# Altium PCB 795540071NUCLEO-DG_V3.PcbDoc (part 1 of 2)
Units mm, origin at the board's own origin, x right, y up, seen from the top; angles counter-clockwise.
Board outline 74.51 x 73.97 mm, 2 copper layers (Top Layer, Bottom Layer); 62 components, 85 nets, 350 pads, 246 vias.
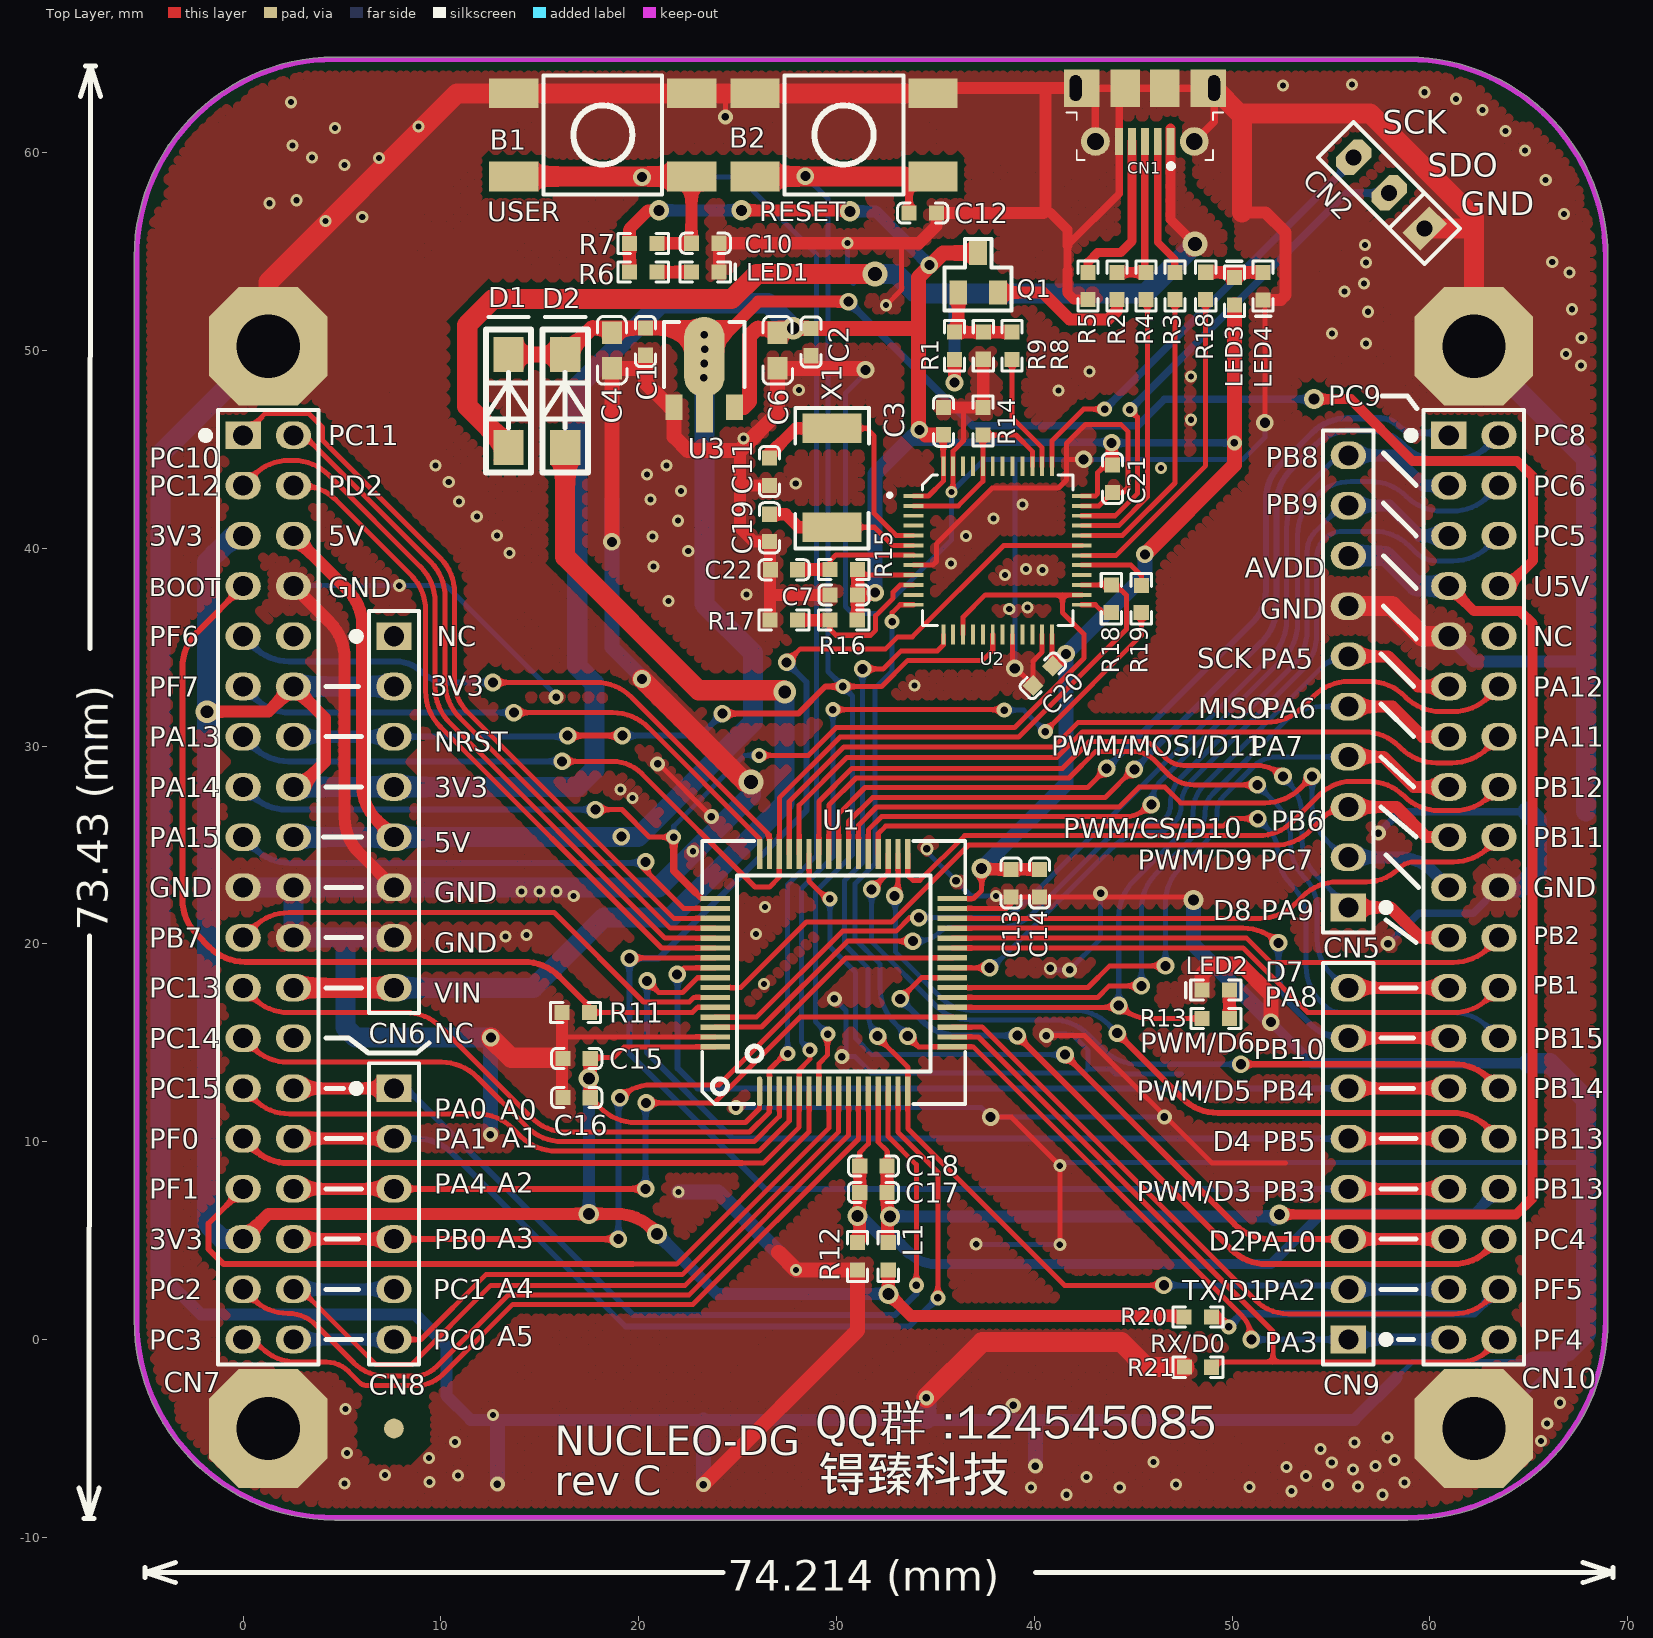
[diagram p0: Top Layer view]
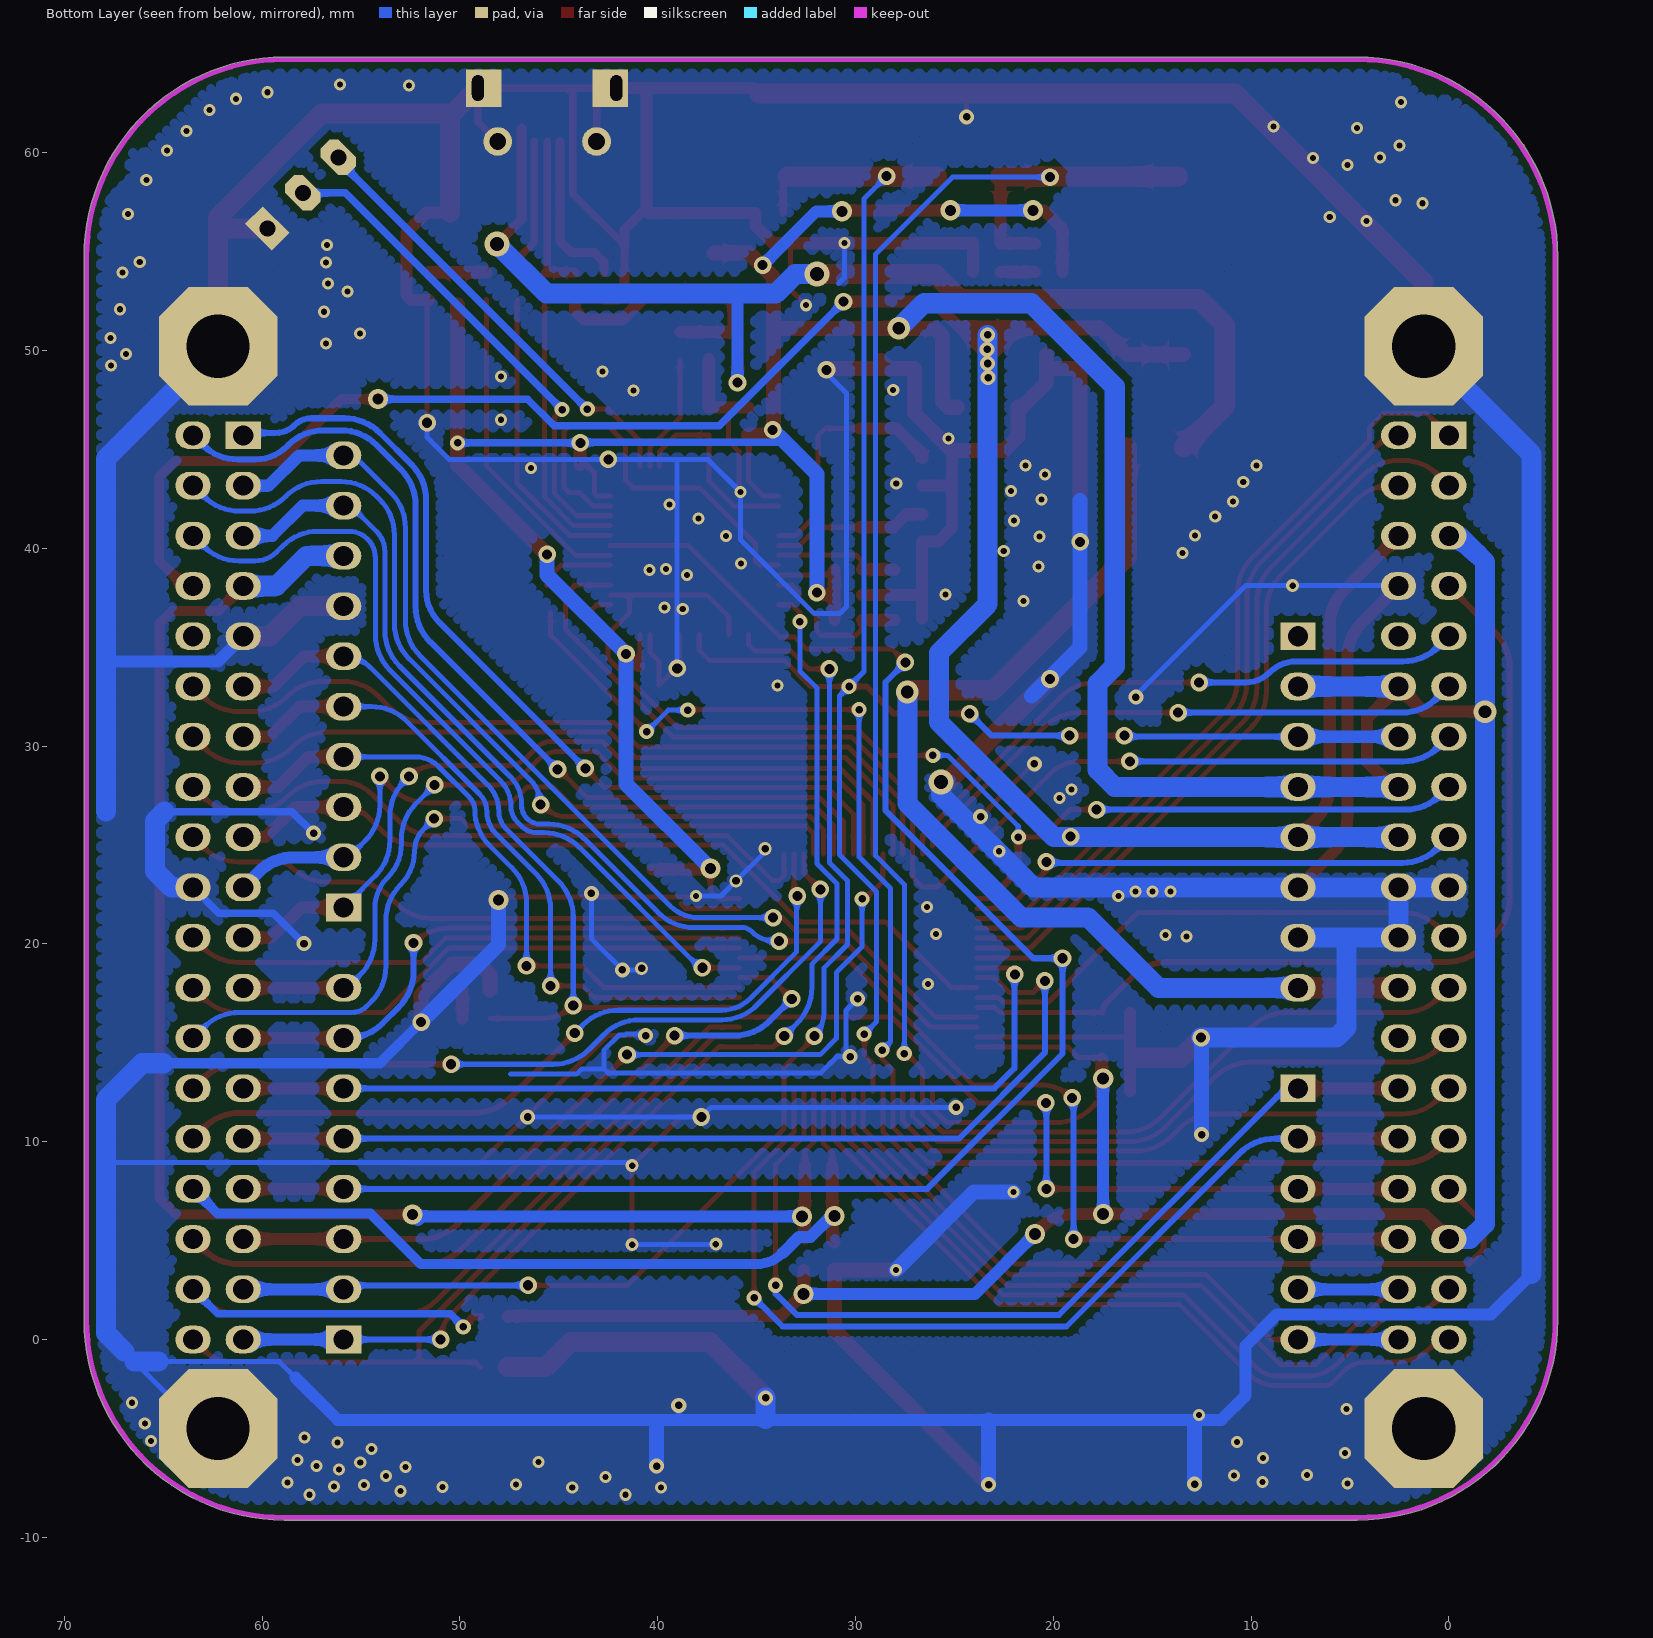
[diagram p1: Bottom Layer view, seen from below]

## Layer stack, top to bottom
Top Solder: solder mask 0.0102, Solder Resist, Dk 3.5
Top Layer: signal copper 0.0356
Dielectric 1: dielectric 0.32, FR-4, Dk 4.8
Bottom Layer: signal copper 0.0356
Bottom Solder: solder mask 0.0102, Solder Resist, Dk 3.5

## Board outline
-5.507,1.008 cw(c-5.38,1.016) -5.507,1.016 -5.507,54.736 cw(c-5.38,54.736) -5.507,54.738 cw(c4.62,54.72) 4.62,64.847 58.88,64.847 cw(c58.88,54.72) 69.007,54.72 cw(c68.88,54.72) 69.007,54.719 69.007,1 cw(c58.88,1) 58.88,-9.127 4.62,-9.127 cw(c4.62,1) -5.507,1 cw(c-5.38,1)

## Design rules (kind name [scope] priority, off if disabled: settings)
Clearance [All] p1: gap=0.33
PolygonConnect [All] p1: connectstyle=Direct reliefconductorwidth=0.254 reliefentries=4 polygonreliefangle="90 Angle" airgapwidth=0.254
RoutingVias [All] p1: holewidth=0.711 width=1.27 viastyle="Through Hole" minholewidth=0.305 minwidth=0.508 maxholewidth=0.711 maxwidth=1.27
SolderMaskExpansion [All] p1: expansion=0.102
Width [All] p1: maxlimit=2.54 minlimit=0.254 preferedwidth=0.254
30 further rules are at their usual default settings.

## Classes and differential pairs
component class NUCLEO-DG: B1 B2 C10 C12 C13 C14 C15 C16 C17 C18 CN5 CN6 CN7 CN8 CN9 CN10 L1 LED1 LED2 R6 R7 R11 R12 R13 R20 R21 U1
component class ST_LINK_V2-1: C1 C2 C3 C4 C6 C7 C11 C19 C20 C21 C22 CN1 CN2 D1 D2 LED3 LED4 Q1 R1 R2 R3 R4 R5 R8 R9 R14 R15 R16 R17 R18 R19 U2 U3 X1

## Components (designator, comment, footprint, x,y, rotation, side; value= is the part's Value field where it differs from the comment)
B1 "USER" KG6*6TP 18.186,60.909 r0 top locked
B2 "RESET" KG6*6TP 30.378,60.909 r0 top locked
C1 "104/10V" 0603C 20.269,50.495 r270 top
C2 "104/10V" 0603C 28.651,50.47 r270 top
C3 "104/10V" 0603C 35.484,46.406 r90 top
C4 "476/16V" 0805C 18.694,50.07 r270 top
C6 "476/16V" 0805C 27.076,50.07 r270 top
C7 "104/10V" 0603C 30.404,37.719 r180 top
C10 "100nF" 0603C 23.393,55.499 r180 top
C11 "20pF/10V" 0603C 26.543,43.917 r270 top
C12 "100nF" 0603C 34.392,57.023 r180 top
C13 "105" 0603C 38.76,23.114 r270 top
C14 "100nF" 0603C 40.208,23.114 r270 top
C15 "100nF" 0603C 16.891,14.275 r180 top
C16 "100nF" 0603C 16.891,12.294 r180 top
C17 "1uF" 0603C 31.902,7.493 r180 top
C18 "100nF" 0603C 31.902,8.839 r180 top
C19 "20pF/10V" 0603C 26.543,41.072 r270 top
C20 "104/10V" 0603C 40.411,33.63 r225 top
C21 "104/10V" 0603C 43.891,43.561 r270 top
C22 "104/10V" 0603C 27.381,38.989 r180 top
CN1 "1050170001" Molex_1050170001 45.593,60.579 r180 top
CN2 "CON3" SIP3 59.741,56.185 r135 top
CN5 "Header 10X1_Female" 1*10P_FEMALE 55.88,21.844 r90 top locked
CN6 "Header 8X1_Female" 1*8P_FEMALE 7.62,35.56 r270 top locked (schematic designator CN8)
CN7 "Header 19X2" 2*19P 0,45.72 r270 top locked (schematic designator CN9)
CN8 "Header 6X1_Female" 1*6P_FEMALE 7.62,12.7 r270 top locked (schematic designator CN14)
CN9 "Header 8X1_Female" 1*8P_FEMALE 55.88,0 r90 top locked (schematic designator CN11)
CN10 "Header 19X2" 2*19P 60.96,45.72 r270 top locked
D1 "SS14" TP4007 13.411,45.108 r90 top
D2 "SS14" TP4007 16.281,45.108 r90 top (schematic designator D3)
L1 "10uH" 0603 32.69,4.267 r90 top
LED1 "RED" 0603D 22.631,53.924 r0 top
LED2 "GREEN" 0603D 49.911,17.729 r180 top
LED3 "GREEN" 0603D 50.177,52.273 r90 top
LED4 "RED" 0603D 51.511,53.996 r270 top
Q1 "9013" SOT23-NPN 37.135,54.94 r0 top
R1 "10K" 0603 35.89,50.19 r270 top
R2 "1K5" 0603 44.111,53.213 r270 top
R3 "22" 0603 47.041,53.213 r270 top
R4 "22" 0603 45.576,53.213 r270 top
R5 "100K" 0603 42.647,53.213 r270 top
R6 "510" 0603 20.168,54.051 r180 top
R7 "10K" 0603 20.168,55.499 r180 top
R8 "100" 0603 38.811,50.19 r270 top
R9 "36K" 0603 37.495,50.316 r90 top
R11 "10K" 0603 16.866,16.459 r0 top
R12 "0" 0603 31.14,4.267 r90 top
R13 "510" 0603 49.124,16.307 r180 top
R14 "10K" 0603 37.338,46.38 r270 top
R15 "100K" 0603 30.429,38.862 r0 top
R16 "10K" 0603 30.302,36.449 r180 top
R17 "10K" 0603 27.28,36.449 r180 top
R18 "100" 0603 43.967,37.516 r90 top
R18 "100" 0603 48.743,53.331 r90 top
R19 "100" 0603 45.339,37.389 r270 top
R20 "0" 0603 48.21,1.219 r180 top
R21 "0" 0603 48.336,-1.473 r0 top
U1 "MCU_LQFP64" LQFP-64 26.111,12.548 r90 top
U2 "STM32F103CBT6" "QFP48 7X7" 38.151,39.903 r270 top (schematic designator U1)
U3 "RS3236-3.3YE3L" SOT-89 21.793,47.139 r0 top
X1 "8MHz(12pF)" XTAL-5032 29.769,41.072 r90 top

## Footprints (in the part's own frame and the unit in brackets; to place one, negate y for a bottom-side part, rotate by r counter-clockwise, add the part's x,y. Pads: shape width x height; smd on the part's side, far side on the other; paste and mask are expansions set on the pad)
1*6P_FEMALE [mil]
  rect 55x70 hole 40: 1(0,0)
  oval 55x70 hole 40: 2(100,0) 3(200,0) 4(300,0) 5(400,0) 6(500,0)
  silkscreen extent -50,-82 550,50
1*8P_FEMALE [mil]
  rect 55x70 hole 40: 1(0,0)
  oval 55x70 hole 40: 2(100,0) 3(200,0) 4(300,0) 5(400,0) 6(500,0) 7(600,0) 8(700,0)
  silkscreen extent -50,-82 750,50
1*10P_FEMALE [mil]
  rect 55x70 hole 40: 1(0,0)
  oval 55x70 hole 40: 2(100,0) 3(200,0) 4(300,0) 5(400,0) 6(500,0) 7(600,0) 8(700,0) 9(800,0) 10(900,0)
  silkscreen extent -50,-82 950,50
2*19P [mil]
  rect 55x70 hole 40: 1(0,0)
  oval 55x70 hole 40: 2(0,100) 3(100,0) 4(100,100) 5(200,0) 6(200,100) 7(300,0) 8(300,100) 9(400,0) 10(400,100) 11(500,0) 12(500,100) 13(600,0) 14(600,100) 15(700,0) 16(700,100) 17(800,0) 18(800,100) 19(900,0) 20(900,100) 21(1000,0) 22(1000,100) 23(1100,0) 24(1100,100) 25(1200,0) 26(1200,100) 27(1300,0) 28(1300,100) 29(1400,0) 30(1400,100) 31(1500,0) 32(1500,100) 33(1600,0) 34(1600,100) 35(1700,0) 36(1700,100) 37(1800,0) 38(1800,100)
  silkscreen extent -50,-82 1850,150
0603 [mil]
  rect 30x30 smd: 1(-29.48,2.91) 2(25.02,2.85)
  silkscreen extent -52,-17 48,23
0603C [mil]
  rect 30x30 smd: 1(-25.86,2.64) 2(28.64,2.57)
  silkscreen extent -49,-17 51,23
0603D [mil]
  rect 30x30 smd: A(1.66,2.32) K(56.16,2.26)
  silkscreen extent -21,-18 89,22
0805C [mil]
  rect 45x40 smd: 1(-33.05,-1.99) 2(37.82,-1.99)
  silkscreen extent -66,-31 69,28
KG6*6TP [mm]
  rect 2.5x1.5 smd: 1(-4.5,2.1) 1(4.5,2.1) 2(-4.5,-2.1) 2(4.5,-2.1)
  silkscreen extent -3,-3 3,3
LQFP-64 [mm]
  oval 1.5x0.27 smd: 1(0,0)
  rect 1.5x0.27 smd: 2(0,-0.5) 3(0,-1) 4(0,-1.5) 5(0,-2) 6(0,-2.5) 7(0,-3) 8(0,-3.5) 9(0,-4) 10(0,-4.5) 11(0,-5) 12(0,-5.5) 13(0,-6) 14(0,-6.5) 15(0,-7) 16(0,-7.5) 33(12,-7.5) 34(12,-7) 35(12,-6.5) 36(12,-6) 37(12,-5.5) 38(12,-5) 39(12,-4.5) 40(12,-4) 41(12,-3.5) 42(12,-3) 43(12,-2.5) 44(12,-2) 45(12,-1.5) 46(12,-1) 47(12,-0.5) 48(12,0)
  rect 0.27x1.5 smd: 17(2.25,-9.75) 18(2.75,-9.75) 19(3.25,-9.75) 20(3.75,-9.75) 21(4.25,-9.75) 22(4.75,-9.75) 23(5.25,-9.75) 24(5.75,-9.75) 25(6.25,-9.75) 26(6.75,-9.75) 27(7.25,-9.75) 28(7.75,-9.75) 29(8.25,-9.75) 30(8.75,-9.75) 31(9.25,-9.75) 32(9.75,-9.75) 49(9.75,2.25) 50(9.25,2.25) 51(8.75,2.25) 52(8.25,2.25) 53(7.75,2.25) 54(7.25,2.25) 55(6.75,2.25) 56(6.25,2.25) 57(5.75,2.25) 58(5.25,2.25) 59(4.75,2.25) 60(4.25,2.25) 61(3.75,2.25) 62(3.25,2.25) 63(2.75,2.25) 64(2.25,2.25)
  silkscreen extent -0.65,-10.4 12.65,2.9
Molex_1050170001 [mm] "USB Micro-B Connector"
  rect 0.4x1.35 smd: 1(-1.3,0) 2(-0.65,0) 3(0,0) 4(0.65,0) 5(1.3,0)
  round 1.45 hole 0.85: 6(-2.5,0) 11(2.5,0)
  rect 1.8x1.9 hole 0.6 slot 1.3 at 90 deg copper offset 0.3,0: 7(-3.5,-2.7)
  rect 1.5x1.9 smd: 8(-1,-2.7) 9(1,-2.7)
  rect 1.8x1.9 hole 0.6 slot 1.3 at 90 deg copper offset -0.3,0: 10(3.5,-2.7)
  silkscreen extent -3.95,-1.46 3.95,1.37, body extent -4.1,-5.21 4.1,0.19, height 2.58
"QFP48 7X7" [mm]
  rect 0.2x1 smd: 1(-2.75,-4.25) 2(-2.25,-4.25) 3(-1.75,-4.25) 4(-1.25,-4.25) 5(-0.75,-4.25) 6(-0.25,-4.25) 7(0.25,-4.25) 8(0.75,-4.25) 9(1.25,-4.25) 10(1.75,-4.25) 11(2.25,-4.25) 12(2.75,-4.25) 25(2.75,4.25) 26(2.25,4.25) 27(1.75,4.25) 28(1.25,4.25) 29(0.75,4.25) 30(0.25,4.25) 31(-0.25,4.25) 32(-0.75,4.25) 33(-1.25,4.25) 34(-1.75,4.25) 35(-2.25,4.25) 36(-2.75,4.25)
  rect 1x0.2 smd: 13(4.25,-2.75) 14(4.25,-2.25) 15(4.25,-1.75) 16(4.25,-1.25) 17(4.25,-0.75) 18(4.25,-0.25) 19(4.25,0.25) 20(4.25,0.75) 21(4.25,1.25) 22(4.25,1.75) 23(4.25,2.25) 24(4.25,2.75) 37(-4.25,2.75) 38(-4.25,2.25) 39(-4.25,1.75) 40(-4.25,1.25) 41(-4.25,0.75) 42(-4.25,0.25) 43(-4.25,-0.25) 44(-4.25,-0.75) 45(-4.25,-1.25) 46(-4.25,-1.75) 47(-4.25,-2.25) 48(-4.25,-2.75)
  silkscreen extent -3.81,-5.52 3.81,3.81
SIP3 [mil]
  rect 50x75 hole 32: 1(0,0)
  oct 50x75 hole 32: 2(100,0) 3(200,0)
  silkscreen extent -50,-50 250,50
SOT23-NPN [mm]
  rect 0.9x1.2 smd: B(-0.975,-2) C(0.015,0) E(1.025,-2)
  silkscreen extent -1.68,-2.9 1.72,0.7
SOT-89 [mil]
  rect 34x50 smd: 1(0,0) 3(120,0)
  rect 34x100 smd: 2(60,0)
  oval 80x160 smd: 2(60,100)
  silkscreen extent -20,40 140,170
TP4007 [mil]
  rect 70x60 smd: A(0,0) K(185,0)
  silkscreen extent -50,-45 260,46
XTAL-5032 [mm]
  rect 1.5x3 smd: 1(0,0) 2(5,0)
  silkscreen extent -1.07,-1.88 6.02,1.85

## Part data
B1 B2: library part SW6, "K"
C1 C2 C3 C4 C6 C7 C19 C20 C21 C22: library part C, "C"
C10 C11 C12: library part CAP, "Capacitor"
C13: library part "CAP SMD 0603  X5R 1礔 25V 10%", "0603  X5R 1礔"
C14 C15 C16 C17 C18: library part Cap, "Capacitor"
CN2: "CN"
CN5: "Header, 10-Pin, Single row,female"
CN6 CN9: "Header, 8-Pin, Single row,female"
CN7 CN10: "Header, 19-Pin, Dual row"
CN8: "Header, 6-Pin, Single row,female"
D1 D2: library part D, "D"
L1: library part Inductor, "Inductor"
LED1 LED2 LED3 LED4: library part LED, "LED"
Q1: library part NPN, "Q"
R1 R9: library part Res1, "Resistor"
R2 R3 R4 R5 R8 R14 R15 R16 R17 R18 R18 R19: library part Resistor_ST, "Resistor 0402 / 0603 / 0805"
R6 R12 R13 R20 R21: library part R, "10K"
R7 R11: library part R
U2: "Medium-density performance line ARM-based 32-bit MCU with 64KB Flash"
U3: library part HT7130, "IC"
X1: library part XTAL, "Crystal Oscillator"

## Free pads (board coordinates)
  oct 6x6 hole 3.2: 1(1.27,50.22) 2(62.23,50.22) 3(62.23,-4.5) 4(1.27,-4.5)
  round 1 smd mask+1: 5(7.62,-4.5)

## Via types
v1: diameter 0.61, hole 0.305, Top Layer to Bottom Layer, 118 vias
v2: diameter 0.889, hole 0.508, Top Layer to Bottom Layer, 62 vias
v3: diameter 0.762, hole 0.381, Top Layer to Bottom Layer, 40 vias
v4: diameter 1.016, hole 0.559, Top Layer to Bottom Layer, 7 vias
v5: diameter 1.016, hole 0.61, Top Layer to Bottom Layer, 6 vias
v6: diameter 0.66, hole 0.33, Top Layer to Bottom Layer, 4 vias
v7: diameter 1.143, hole 0.635, Top Layer to Bottom Layer, 3 vias
v8: diameter 0.66, hole 0.381, Top Layer to Bottom Layer, 3 vias
v9: diameter 1.27, hole 0.711, Top Layer to Bottom Layer, 3 vias

## Nets (pads, with @x,y where several pads share a name; then routed paths per layer and width w, separated by ;. In a path a pad name is that pad's centre, name@x,y a point inside that pad or via, vN(x,y) a via of type N, cw(c..) or ccw(c..) an arc to the next point about the centre after c; other vN are vias at no path point)
+5V: C1.1 C4.1 CN6.5 CN7.6 CN7.18 CN10.8 D1.K D2.K U3.2 | length 131.6
  Top Layer w0.508: v4(54.153,47.549) 56.007,47.549 59.131,44.425 64.414,44.425 65.227,43.612 65.227,39.395 63.932,38.1 CN10.8@63.5,38.1
  Top Layer w0.61: CN7.6@2.54,40.64 5.276,37.904 cw(c3.48,36.108) 6.02,36.108 6.02,28.052 ccw(c8.56,28.052) 6.764,26.256 CN6.5@7.62,25.4 ; U3.2@23.317,49.679 23.317,49.756 26.037,52.476 v2(30.607,52.476)
  Top Layer w0.762: D1.K@13.411,49.807 D2.K@16.281,49.807 17.626,51.152 C1.1@20.336,51.152 21.844,51.152 ; U3.2@23.317,49.679 21.844,51.152 ; 24.605,51.152 21.844,51.152
  Bottom Layer w0.381: v2(30.607,52.476) 36.881,46.203 45.24,46.203 46.586,47.549 v4(54.153,47.549)
  Bottom Layer w1.016: CN7.18@2.54,25.4 CN6.5@7.62,25.4 19.964,25.4 25.781,31.217 25.781,34.722 23.317,37.186 v3(23.317,50.8)
  other v2: 19.126,25.425
  other v3: 23.292,48.641 23.317,49.352 23.343,50.063
AGND: C17.2 C18.2 CN10.32 R12.2 U1.12 | length 42.8
  Top Layer w0.254: C18.2@31.175,8.774 31.175,9.458 31.611,9.894 U1.12@31.611,12.548
  Top Layer w0.61: R12.2@31.068,4.903 31.175,5.01 C17.2@31.175,7.428 C18.2@31.175,8.774
  Bottom Layer w0.508: 33.68,4.369 ccw(c35.029,5.718) 35.029,3.81 51.968,3.81 54.534,6.375 62.255,6.375 CN10.32@63.5,7.62
  Bottom Layer w0.61: v5(31.064,6.248) 31.217,6.248 32.284,5.182 32.868,5.182 33.68,4.369
AIN_1: R16.2 R17.1 U2.10 | length 8.1
  Top Layer w0.254: R16.2@29.667,36.377 29.667,35.916 29.972,35.611 31.725,35.611 31.979,35.865 31.979,36.598 32.868,37.487 32.868,37.798 33.223,38.153 U2.10@33.901,38.153
  Top Layer w0.61: R17.1@28.028,36.375 28.03,36.377 R16.2@29.667,36.377
AVDD: C17.1 C18.1 CN5.8 CN10.7 L1.2 U1.13 | length 80.4
  Top Layer w0.254: U1.13@32.111,12.548 32.111,9.977 32.559,9.529 C18.1@32.559,8.772
  Top Layer w0.508: v4(52.4,6.325) 64.364,6.325 65.202,7.163 65.202,36.195 64.567,36.83 62.23,36.83 CN10.7@60.96,38.1
  Top Layer w0.61: L1.2@32.559,5.113 C17.1@32.559,7.426 C18.1@32.559,8.772
  Bottom Layer w0.61: v5(32.715,6.223) 51.943,6.223 52.121,6.045 v4(52.4,6.325)
  Bottom Layer w1.016: CN5.8@55.88,39.624 57.76,39.624 59.284,38.1 CN10.7@60.96,38.1
BOOT0: CN7.7 R11.2 U1.60 | length 46.9
  Top Layer w0.254: R11.2@17.501,16.535 22.708,16.535 22.97,16.798 U1.60@23.861,16.798
  Top Layer w0.305: CN7.7@0,38.1 -2.329,35.771 ccw(c-0.533,33.974) -3.073,33.974 -3.073,22.261 ccw(c-0.533,22.261) -2.329,20.465 -1.709,19.845 ccw(c0.087,21.641) 0.087,19.101 14.188,19.101 cw(c14.188,16.561) 15.984,18.357 17.283,17.058 cw(c16.757,16.532) 17.501,16.535 cw(c16.757,16.532) R11.2@17.501,16.532
GND: B1.1 B2.1 C1.2 C2.2 C3.2 C4.2 C6.2 C7.2 C10.1 C11.2 C12.1 C13.2 C14.2 C15.2 C16.2 C19.2 C20.2 C21.2 C22.2 CN1.5 CN1.6 CN1.7 CN1.8 CN1.9 CN1.10 CN1.11 CN2.1 CN5.7 CN6.6 CN6.7 CN7.8 CN7.19 CN7.20 CN7.22 CN10.9 CN10.20 LED1.K LED2.K LED4.K pad.1 pad.2 pad.3 pad.4 R5.2 R9.1 R11.1 R12.1 R14.1 R17.2 R21.1 U1.31 U1.63 U2.8 U2.20 U2.23 U2.35 U2.47 U3.1 | length 817
  Top Layer w0.254: 16.117,15.298 U1.63@23.861,15.298 ; v3(20.955,29.108) 21.006,29.108 v3(23.673,26.441) ; 24.333,63.009 24.384,62.958 v3(24.384,61.824) ; R17.2@26.644,36.377 R17.2@26.644,36.453 ; v1(32.512,52.299) 33.28,53.066 33.28,55.361 33.35,55.432 ; U2.8@33.901,39.153 34.861,39.153 35.052,39.345 35.052,40.234 37.871,43.053 41.224,43.053 41.631,43.459 41.631,45.314 42.596,46.279 44.374,46.279 44.729,45.923 44.729,43.078 44.484,42.833 C21.2@43.957,42.833 43.276,42.153 U2.35@42.401,42.153 ; v1(35.814,42.85) 35.901,42.937 U2.47@35.901,44.153 35.901,44.918 36.424,45.441 36.424,47.117 ; U1.31@35.861,21.798 38.587,21.798 C13.2@38.826,22.036 ; v2(37.795,11.252) 38.837,11.252 v6(41.3,8.788) 41.3,5.046 ccw(c41.647,5.046) 41.402,4.801 v6(41.3,4.801) ; v1(38.075,22.428) 38.116,22.386 C13.2@38.826,22.386 C14.2@40.274,22.386 v4@47.895,22.386 ; U2.20@38.901,35.653 38.901,34.111 C20.2@39.943,33.069 39.943,34.304 40.401,34.762 U2.23@40.401,35.653 ; v3(40.615,15.367) 42.545,15.367 48.997,8.915 52.705,8.915 ; 41.707,44.501 v2(42.494,44.501) ; v2(51.664,46.355) LED4.K@51.664,52.474
  Top Layer w0.381: 41.681,54.051 41.681,55.321 44.293,57.933 CN1.5@44.293,60.579 44.293,62.979 CN1.9@44.593,63.279 ; CN1.11@43.093,60.579 43.093,63.137 42.951,63.279 CN1.9@44.593,63.279 ; CN1.6@48.093,60.579 49.093,61.579 CN1.7@49.093,63.279 CN1.8@46.593,63.279 CN1.9@44.593,63.279
  Top Layer w0.508: 40.807,56.992 41.681,56.117 41.681,55.321 ; 41.681,54.051 41.681,52.908 42.012,52.577 R5.2@42.719,52.577
  Top Layer w0.61: CN7.8@2.54,38.1 4.387,36.253 cw(c2.591,34.457) 5.131,34.457 5.131,26.401 ccw(c7.671,26.401) 5.875,24.605 CN6.6@7.62,22.86 ; C16.2@16.117,12.554 16.117,15.298 R11.1@16.117,16.533 ; LED1.K@24.058,53.982 24.05,53.989 C10.1@24.05,55.432 33.35,55.432 34.172,55.432 35.048,56.308 C12.1@35.048,56.956 40.471,56.956 40.564,57.048 40.564,63.254 40.589,63.279 ; 25.121,44.958 25.121,41.046 25.823,40.344 C19.2@26.608,40.344 26.644,40.309 R17.2@26.644,36.453 ; 25.137,43.189 C11.2@26.608,43.189 ; 26.655,37.654 C7.2@29.676,37.654 ; B2.1@34.878,63.009 35.148,63.279 40.589,63.279 ; C3.2@35.423,47.129 R14.1@37.412,47.129 ; R14.1@37.421,47.139 R9.1@37.421,49.568 ; CN1.10@42.093,63.279 40.589,63.279 ; 50.507,56.992 51.695,56.992 52.705,55.982 52.705,52.807 52.468,52.569 LED4.K@51.569,52.569
  Top Layer w0.762: v2(18.644,40.335) C4.2@18.644,49.109 20.298,49.109 ; C1.2@20.335,49.768 20.335,48.398 21.594,47.139 U3.1@21.793,47.139 21.793,45.644 22.479,44.958 25.121,44.958 27.026,46.863 C6.2@27.026,49.109 28.332,49.109 ; v3(23.266,-7.341) 31.066,0.459 R12.1@31.066,3.518 v1(27.952,3.518) 27.076,4.394 ; C2.2@28.717,49.494 28.332,49.109 ; v2(31.465,49.027) 31.384,49.109 28.332,49.109 ; LED2.K@48.484,17.672 48.484,18.462 48.997,18.974 50.414,18.974 51.968,17.42 v2(51.968,16.053)
  Top Layer w1.016: pad.4@1.27,-5.537 pad.4@1.27,-4.5 ; pad.1@1.27,50.22 1.27,53.467 10.812,63.009 B1.1@13.686,63.009 B1.1@22.686,63.009 24.333,63.009 B2.1@25.878,63.009 B2.1@34.878,63.009 ; v2(12.522,15.265) 13.538,14.249 15.712,14.249 ; v2(20.168,33.401) 25.375,28.194 v9(25.679,28.194) ; v3(34.544,-2.946) 37.363,-0.127 44.399,-0.127 45.671,-1.399 R21.1@47.587,-1.399 ; CN1.7@49.093,63.279 50.38,61.992 50.507,61.992 ; 50.507,56.992 50.507,61.992 ; CN5.7@55.88,37.084 58.09,37.084 59.614,35.56 CN10.9@60.96,35.56 ; CN2.1@59.741,56.185 62.001,56.185 ; pad.2@62.23,50.22 62.23,56.744 56.982,61.992 50.507,61.992
  Bottom Layer w0.254: CN7.8@2.54,38.1 2.565,38.125 v6(7.899,38.125) 10.262,38.125 v3@15.824,32.563 ; v3(24.917,11.735) 37.313,11.735 v2(37.795,11.252) v3(46.584,11.252) ; v3(29.896,17.221) 30.48,16.637 30.48,14.503 v3(30.277,14.3) 30.937,14.3 31.75,13.487 42.52,13.487 42.723,13.691 ; v1(30.556,55.448) 30.556,53.698 30.856,53.398 ; v2(31.465,49.027) 31.465,48.864 30.455,47.854 30.455,37.059 30.81,36.703 32.08,36.703 35.814,40.437 v1(35.814,42.85) 37.465,44.501 39.014,44.501 ; v8(34.569,24.816) 34.569,24.663 v8(36.043,23.19) 36.805,22.428 v1(38.075,22.428) ; v6(37.059,4.826) 37.084,4.801 v6(41.3,4.801) ; 38.938,-4.039 v3(38.938,-3.327) ; v2(39.014,33.934) 39.014,44.501 ; v3@40.615,15.443 41.615,15.443 41.657,15.402 41.946,15.402 42.723,14.625 42.723,13.691 ; v8(40.818,18.771) 40.894,18.694 v3(41.783,18.694) 43.358,20.269 v3(43.358,22.555) ; v6(41.3,8.788) cw(c41.699,8.39) 41.699,8.954 67.805,8.954 ; 47.436,13.422 44.098,13.422 43.829,13.691 42.723,13.691 ; v2(51.664,46.355) 51.664,45.618 50.546,44.501 v2(42.494,44.501) 39.014,44.501 ; 58.318,-1.93 59.131,-1.118 65.253,-1.118 ; pad.2@60.355,52.095 pad.2@62.23,50.22 ; pad.3@62.23,-4.5 63.077,-4.5 66.459,-1.118 66.974,-0.603
  Bottom Layer w0.381: v3(57.404,25.603) 58.496,26.695 64.948,26.695 ; v3(57.887,20.015) 59.436,21.565 62.205,21.565 CN10.20@63.5,22.86
  Bottom Layer w0.508: v2(51.968,16.053) 54.051,13.97 64.999,13.97
  Bottom Layer w0.61: -4.191,3.327 -2.134,1.27 8.687,1.27 10.274,-0.318 10.274,-2.832 11.506,-4.064 23.266,-4.064 56.185,-4.064 58.318,-1.93 ; CN10.9@60.96,35.56 62.23,34.29 67.869,34.29
  Bottom Layer w0.762: v3(12.497,10.363) v2@12.497,15.24 ; v3(12.852,-7.315) 12.852,-4.445 ; 18.644,42.418 18.644,35.001 21.107,32.537 ; v1(22.022,7.468) 24.003,7.468 v1(27.952,3.518) ; v3(23.266,-7.341) 23.266,-4.064 ; v3(40.056,-6.401) 40.056,-4.242 ; v4(48.057,22.225) 48.057,19.964 v2(51.968,16.053)
  Bottom Layer w1.016: -4.191,3.327 -4.191,44.759 pad.1@1.27,50.22 ; CN7.19@0,22.86 CN7.20@2.54,22.86 ; CN6.7@7.62,20.32 5.182,20.32 ; v2(12.522,15.265) 5.69,15.265 5.182,15.773 5.182,20.32 ; v9(25.679,28.194) 25.679,27.534 21.006,22.86 CN6.6@7.62,22.86 CN7.20@2.54,22.86 ; 34.544,-4.013 v3(34.544,-2.946) ; pad.2@62.23,50.22 67.894,44.556 67.894,26.695 ; CN10.20@63.5,22.86 64.592,22.86 65.43,23.698 65.43,26.213 64.948,26.695 ; 64.999,13.97 66.065,13.97 67.894,12.141 67.894,0.317 66.974,-0.603 ; 65.253,-1.118 66.459,-1.118 ; CN7.20@2.54,22.86 CN7.22@2.54,20.32 5.182,20.32
  other v1: 41.631,-7.849 57.607,-7.849 53.01,-7.671 39.827,-7.493 44.323,-7.487 50.876,-7.453 56.363,-7.442 54.864,-7.366 47.168,-7.336 5.131,-7.29 58.725,-7.239 9.423,-7.214 42.647,-6.96 53.746,-6.909 10.871,-6.883 7.176,-6.858 56.109,-6.579 52.749,-6.452 57.252,-6.401 55.042,-6.223 46.025,-6.198 58.217,-6.096 9.398,-5.994 5.258,-5.74 54.483,-5.537 56.185,-5.207 10.719,-5.182 65.634,-5.131 57.861,-4.953 65.938,-4.242 12.624,-3.81 5.182,-3.523 66.573,-3.197 26.34,17.983 13.27,20.371 14.326,20.447 25.933,20.498 26.391,21.869 16.713,22.428 14.072,22.657 14.986,22.657 15.85,22.657 22.733,24.689 19.685,27.381 19.075,27.813 33.934,33.071 38.735,36.932 39.649,37.008 21.514,37.338 25.451,37.668 38.53,38.659 40.411,38.913 39.573,38.964 20.752,39.091 35.791,39.243 13.462,39.776 20.701,40.615 36.549,40.64 12.827,40.654 21.996,41.402 37.948,41.504 11.811,41.605 39.395,42.215 10.922,42.367 20.599,42.469 22.149,42.9 27.94,43.282 10.394,43.358 20.422,43.739 46.406,44.069 9.728,44.196 21.412,44.196 25.298,45.568 47.93,46.507 41.224,47.981 28.092,48.006 47.93,48.692 42.799,48.946 67.64,49.251 66.878,49.835 56.769,50.368 67.666,50.648 55.05,50.876 56.871,51.968 67.183,52.095 55.677,52.984 56.667,53.391 67.063,53.95 56.769,54.458 66.192,54.483 56.718,55.347 4.166,56.566 6.02,56.769 66.777,56.921 1.321,57.455 2.692,57.607 65.862,58.623 5.131,59.385 6.858,59.741 3.48,59.766 64.821,60.122 2.489,60.376 63.83,61.112 4.648,61.265 8.865,61.341 62.662,62.179 2.413,62.563 61.316,62.738 59.741,63.068 52.586,63.398 56.058,63.449
  other v3: 15.824,32.487
LED_STLINK: R18.1@48.669,52.582 U2.30 | length 16.5
  Top Layer w0.254: U2.30@42.401,39.653 44.139,39.653 48.669,44.183 R18.1@48.669,52.582
MCO: R19.1 U2.29 | length 4
  Top Layer w0.254: U2.29@42.401,39.153 44.895,39.153 45.413,38.636 R19.1@45.413,38.342 ; R19.1@45.413,38.138 R19.1@45.413,38.342 ; R19.1@45.616,38.139 R19.1@45.413,38.342
NetCN1_2: CN1.2 R3.1 | length 7
  Top Layer w0.381: CN1.2@46.243,60.579 46.243,55.484 47.115,54.612 R3.1@47.115,53.962
NetCN1_3: CN1.3 R2.1 R4.1 | length 8.1
  Top Layer w0.381: CN1.3@45.593,60.579 45.593,54.019 R4.1@45.65,53.962
  Top Layer w0.508: R2.1@44.185,53.962 R4.1@45.65,53.962
NetCN1_4: CN1.4 R5.1 | length 8.2
  Top Layer w0.457: R5.1@42.721,53.962 42.721,54.481 43.205,54.966 44.374,54.966 44.943,55.535 CN1.4@44.943,60.579
NetLED1_A: LED1.A R6.1 | length 1.8
  Top Layer w0.61: R6.1@20.916,53.977 22.668,53.977 LED1.A@22.674,53.983
NetLED2_A: LED2.A R13.1 | length 1.4
  Top Layer w0.61: R13.1@49.872,16.233 LED2.A@49.872,17.667
NetLED3_K: LED3.K LED4.A R18.2@48.67,53.966 | length 2.9
  Top Layer w0.254: LED4.A@51.558,53.966 LED4.A@51.57,53.954
  Top Layer w0.61: R18.2@48.67,53.966 LED4.A@51.558,53.966
NetQ1_B: Q1.B R1.1 R8.1 R9.2 | length 4.7
  Top Layer w0.61: R1.1@35.964,50.939 R8.1@38.885,50.939 ; R1.1@36.16,51.135 Q1.B@36.16,52.94
NetQ1_E: Q1.E R2.2 | length 7.3
  Top Layer w0.61: Q1.E@38.16,52.94 40.43,52.94 41.783,51.587 43.739,51.587 44.184,52.032 R2.2@44.184,52.577
NetR14_2: R14.2 U2.2 U2.39 U2.44 | length 10
  Top Layer w0.254: U2.2@33.901,42.153 36.159,42.153 37.401,43.395 U2.44@37.401,44.153 37.401,45.735 39.075,45.735 39.901,44.91 U2.39@39.901,44.153
NRST: B2.2 C12.2 CN6.3 CN7.14 U1.7 U2.18 | length 96.2
  Top Layer w0.254: U1.7@29.111,12.548 29.111,13.947 29.54,14.376 29.54,15.418 v3(29.566,15.443) ; v3@30.531,33.02 32.283,33.02 33.604,34.341 37.389,34.341 37.901,34.853 U2.18@37.901,35.653
  Top Layer w0.305: v2(16.408,30.531) v2(19.177,30.531) ; v2(24.232,31.648) 28.067,31.648 29.439,33.02 v3(30.328,33.02) v3@30.531,33.02
  Top Layer w0.381: 33.426,58.809 33.664,58.572 C12.2@33.664,56.958
  Top Layer w1.016: B2.2@25.878,58.809 33.426,58.809
  Bottom Layer w0.254: v2(28.423,58.826) 29.566,57.683 29.566,33.782 v3(30.328,33.02) 30.81,32.537 30.81,24.511 28.931,22.631 28.931,16.078 v3(29.566,15.443)
  Bottom Layer w0.305: CN6.3@7.62,30.48 v2@16.637,30.48 ; v2(19.177,30.531) 23.114,30.531 v2(24.232,31.648)
  Bottom Layer w0.61: CN7.14@2.54,30.48 CN6.3@7.62,30.48
OSC_IN: C11.1 U2.5 X1.2 | length 12.6
  Top Layer w0.254: X1.2@29.769,46.072 31.525,46.072 31.902,45.695 31.902,41.771 33.02,40.653 U2.5@33.901,40.653
  Top Layer w0.61: C11.1@26.61,44.573 26.61,44.746 27.936,46.072 X1.2@29.769,46.072
OSC_OUT: C19.1 U2.6 X1.1 | length 7.9
  Top Layer w0.254: X1.1@29.769,41.072 31.919,41.072 32.838,40.153 U2.6@33.901,40.153
  Top Layer w0.61: C19.1@26.61,41.729 27.436,41.729 28.092,41.072 X1.1@29.769,41.072
PA0: CN7.28 CN8.1 U1.14 | length 47.4
  Top Layer w0.254: U1.14@32.611,12.548 32.611,10.264 34.036,8.839 v3(34.036,2.743)
  Top Layer w0.61: CN7.28@2.54,12.7 CN8.1@7.62,12.7
  Bottom Layer w0.305: CN8.1@7.62,12.7 cw(c7.62,11.167) 8.704,12.251 19.71,1.245 32.969,1.245 34.036,2.311 v3(34.036,2.743)
PA1: CN7.30 CN8.2 U1.15 | length 48.3
  Top Layer w0.254: U1.15@33.111,12.548 33.111,10.482 35.128,8.465 v3(35.128,2.108)
  Top Layer w0.61: CN7.30@2.54,10.16 CN8.2@7.62,10.16
  Bottom Layer w0.305: CN8.2@7.62,10.16 8.778,10.16 cw(c8.778,7.62) 10.574,9.416 19.329,0.66 33.68,0.66 v3(35.128,2.108)
PA2: CN9.2 CN10.35 U1.16 U2.13 | length 61
  Top Layer w0.254: v2(31.318,33.909) 32.36,33.909 33.274,34.823 35.103,34.823 35.401,35.121 U2.13@35.401,35.653 ; v2@31.902,15.469 33.611,13.76 U1.16@33.611,12.548 33.611,10.665 41.533,2.743 v2(46.558,2.743)
  Bottom Layer w0.254: v2(31.318,33.909) 31.318,24.115 30.404,23.201 30.404,19.973 31.602,18.775 31.602,16.495 ccw(c33.232,16.495) v2(32.08,15.342)
  Bottom Layer w0.305: v2(46.558,2.743) 55.524,2.743 55.804,2.464 CN9.2@55.88,2.54
  Bottom Layer w0.61: CN9.2@55.88,2.54 CN10.35@60.96,2.54
PA3: CN9.1 CN10.37 U1.17 U2.12 | length 58.5
  Top Layer w0.254: v3(32.817,36.297) 32.817,36.754 33.216,37.153 U2.12@33.901,37.153 ; v2(33.604,15.342) 34.148,14.798 U1.17@35.861,14.798 36.917,14.798 50.457,1.257 cw(c49.199,0) v2(50.978,0)
  Bottom Layer w0.254: v3(32.817,36.297) 32.817,33.807 31.959,32.95 31.959,24.073 30.937,23.052 30.937,20.252 32.207,18.982 32.207,17.791 ccw(c34.747,17.791) 32.951,15.995 v2(33.604,15.342)
  Bottom Layer w0.305: v2(50.978,0) CN9.1@55.88,0
  Bottom Layer w0.61: CN9.1@55.88,0 CN10.37@60.96,0
PA4: CN7.32 CN8.3 U1.20 | length 39.4
  Top Layer w0.254: v2(20.371,11.963) 23.825,11.963 28.159,16.298 U1.20@35.861,16.298
  Top Layer w0.305: CN8.3@7.62,7.62 v2(20.345,7.62)
  Top Layer w0.61: CN7.32@2.54,7.62 CN8.3@7.62,7.62
  Bottom Layer w0.254: v2@20.371,11.938 v2(20.371,11.963)
  Bottom Layer w0.305: v2(20.345,7.62) v2@20.345,11.938
PA5: CN5.6 CN10.11 R13.2 U1.21 | length 42
  Top Layer w0.254: U1.21@35.861,16.798 44.179,16.798 v2(44.272,16.891) ccw(c45.857,18.476) 45.857,16.234 R13.2@48.488,16.234
  Top Layer w0.61: CN5.6@55.88,34.544 57.887,34.544 59.411,33.02 CN10.11@60.96,33.02
  Bottom Layer w0.254: v2(44.272,16.891) 44.272,21.376 cw(c46.812,21.376) 45.016,23.172 47.672,25.828 ; 47.673,25.829 ccw(c46.805,26.695) 48.031,26.695 cw(c49.932,26.695) 48.588,28.04 54.536,33.987 cw(c55.88,32.643) CN5.6@55.137,34.393 ; CN5.6@55.137,34.393 cw(c55.88,32.643) CN5.6@55.88,34.544 55.288,34.544 CN5.6@55.137,34.393
PA6: CN5.5 CN10.13 U1.22 | length 35.1
  Top Layer w0.254: U1.22@35.861,17.298 43.206,17.298 43.79,17.882 v2(45.415,17.882)
  Top Layer w0.61: CN5.5@55.88,32.004 58.115,32.004 59.639,30.48 CN10.13@60.96,30.48
  Bottom Layer w0.254: v2(45.415,17.882) 45.415,21.757 cw(c47.955,21.757) 46.159,23.553 48.174,25.568 ccw(c47.047,26.695) 48.641,26.695 cw(c49.893,26.695) 49.008,27.581 52.687,31.26 cw(c54.483,29.464) 54.483,32.004 CN5.5@55.88,32.004
PA7: CN5.4 CN10.15 U1.23 | length 33.5
  Top Layer w0.254: U1.23@35.861,17.798 42.715,17.798 43.815,18.898 v2(46.634,18.898)
  Top Layer w0.61: CN5.4@55.88,29.464 57.658,29.464 59.182,27.94 CN10.15@60.96,27.94
  Bottom Layer w0.254: v2(46.634,18.898) 46.634,22.062 cw(c49.174,22.062) 47.378,23.858 48.514,24.994 ccw(c46.736,26.772) 49.251,26.772 cw(c50.143,26.772) 49.512,27.402 51.085,28.976 cw(c52.264,27.797) 52.264,29.464 CN5.4@55.88,29.464
PA8: CN9.8 CN10.23 U1.41 | length 42.8
  Top Layer w0.254: U1.41@29.611,24.548 29.611,27.024 30.985,28.397 41.758,28.397 43.104,29.743 44.99,29.743 cw(c44.99,28.226) 46.062,29.3 ; 46.063,29.299 46.787,28.575 ccw(c48.075,29.863) 48.075,28.042 v2(51.283,28.042)
  Top Layer w0.61: CN9.8@55.88,17.78 CN10.23@60.96,17.78
  Bottom Layer w0.254: v2(51.283,28.042) 52.215,27.109 cw(c50.419,25.313) 52.959,25.313 52.959,25.056 ccw(c55.358,25.056) 53.662,23.359 cw(c52.108,21.806) 54.305,21.806 54.305,20.229 ccw(c56.845,20.229) 55.049,18.433 55.702,17.78 CN9.8@55.88,17.78
PA9: CN5.1 CN10.21 U1.42 | length 41.4
  Top Layer w0.254: U1.42@29.111,24.548 29.111,27.206 30.785,28.88 41.432,28.88 42.795,30.243 45.415,30.243 cw(c45.415,29.304) 46.079,29.969 46.634,29.413 ccw(c47.554,30.333) 47.554,29.032 51.229,29.032 cw(c51.229,27.124) v2(52.578,28.473)
  Top Layer w0.61: CN5.1@55.88,21.844 58.014,21.844 59.538,20.32 CN10.21@60.96,20.32
  Bottom Layer w0.254: v2(52.578,28.473) 52.799,28.252 cw(c51.003,26.456) 53.543,26.456 53.543,25.222 ccw(c56.057,25.222) 54.28,23.444 CN5.1@55.88,21.844
PA10: CN9.3 CN10.33 U1.43 | length 44.5
  Top Layer w0.254: U1.43@28.611,24.548 28.611,23.179 29.515,22.276 v3(29.667,22.276)
  Top Layer w0.305: v2(41.554,14.402) 50.132,5.824 ccw(c51.928,7.62) 51.928,5.08 CN9.3@55.88,5.08
  Top Layer w0.61: CN9.3@55.88,5.08 CN10.33@60.96,5.08
  Bottom Layer w0.254: v3(29.667,22.276) 29.667,19.863 30.963,18.567 30.963,15.227 31.787,14.402 v2(41.554,14.402)
PA11: CN10.14 U1.44 | length 40.3
  Top Layer w0.254: U1.44@28.111,24.548 28.111,27.022 30.527,29.439 41.147,29.439 42.434,30.726 56.665,30.726 cw(c56.665,28.186) 58.461,29.982 58.54,29.903 ccw(c60.336,31.699) 60.336,29.159 61.127,29.159 ccw(c61.127,31.699) 62.923,29.903 CN10.14@63.5,30.48
PA12: CN10.12 U1.45 | length 41.5
  Top Layer w0.254: U1.45@27.611,24.548 27.611,27.205 30.378,29.972 40.984,29.972 42.221,31.208 51.746,31.208 ccw(c51.746,33.748) 53.542,31.952 54.12,32.53 cw(c55.916,30.734) 55.916,33.274 56.936,33.274 cw(c56.936,30.734) 58.732,32.53 58.794,32.468 ccw(c60.528,34.203) 60.528,31.75 61.178,31.75 ccw(c61.178,34.29) 62.974,32.494 CN10.12@63.348,32.868
PA13: CN7.13 R18.2@43.895,38.151 U1.46 U2.27 | length 59.2
  Top Layer w0.254: v2(16.129,29.235) 18.653,29.235 cw(c18.653,27.111) 20.154,28.614 ; 20.155,28.613 25.883,22.885 26.619,22.885 27.111,23.377 U1.46@27.111,24.548 27.111,27.387 30.179,30.455 39.203,30.455 44.653,35.905 44.653,37.643 44.145,38.151 R18.2@43.895,38.151 43.893,38.153 U2.27@42.401,38.153
  Bottom Layer w0.305: CN7.13@0.254,30.226 0.501,29.979 ccw(c2.297,31.775) 2.297,29.235 v2(16.129,29.235)